# Altium PCB Control Board OLD.PcbDoc
Units mm, origin at the board's own origin, x right, y up, seen from the top; angles counter-clockwise.
Board outline 55 x 12 mm, 2 copper layers (Top Layer, Bottom Layer); 17 components, 12 nets, 54 pads, 30 vias.
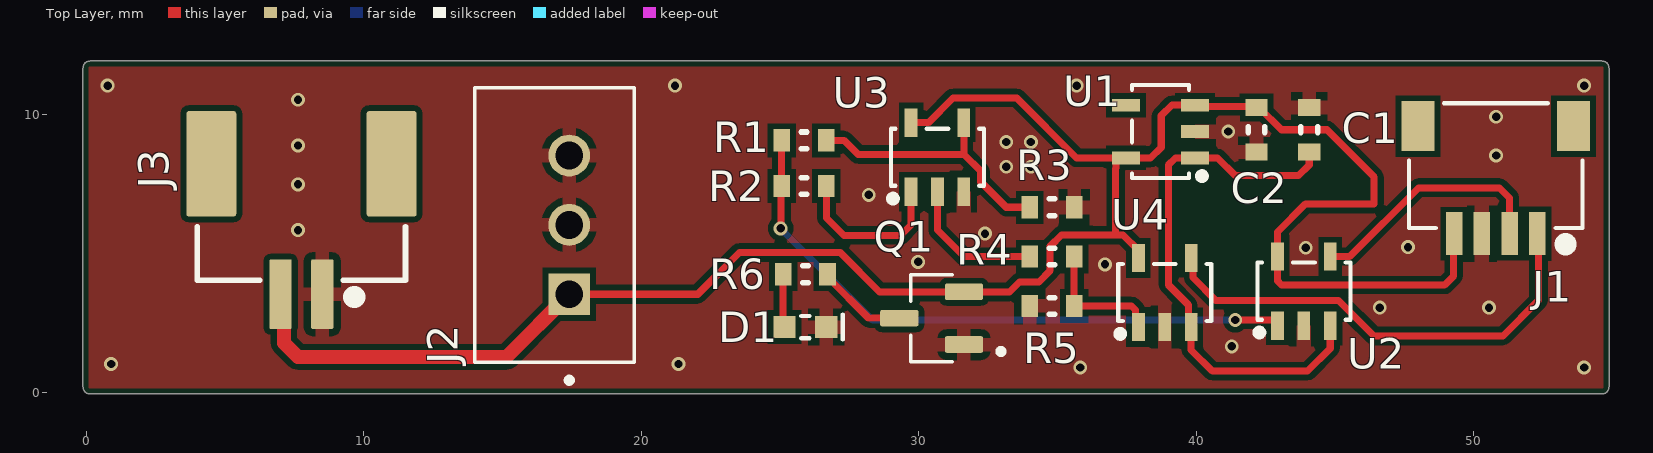
[diagram p0: Top Layer view]
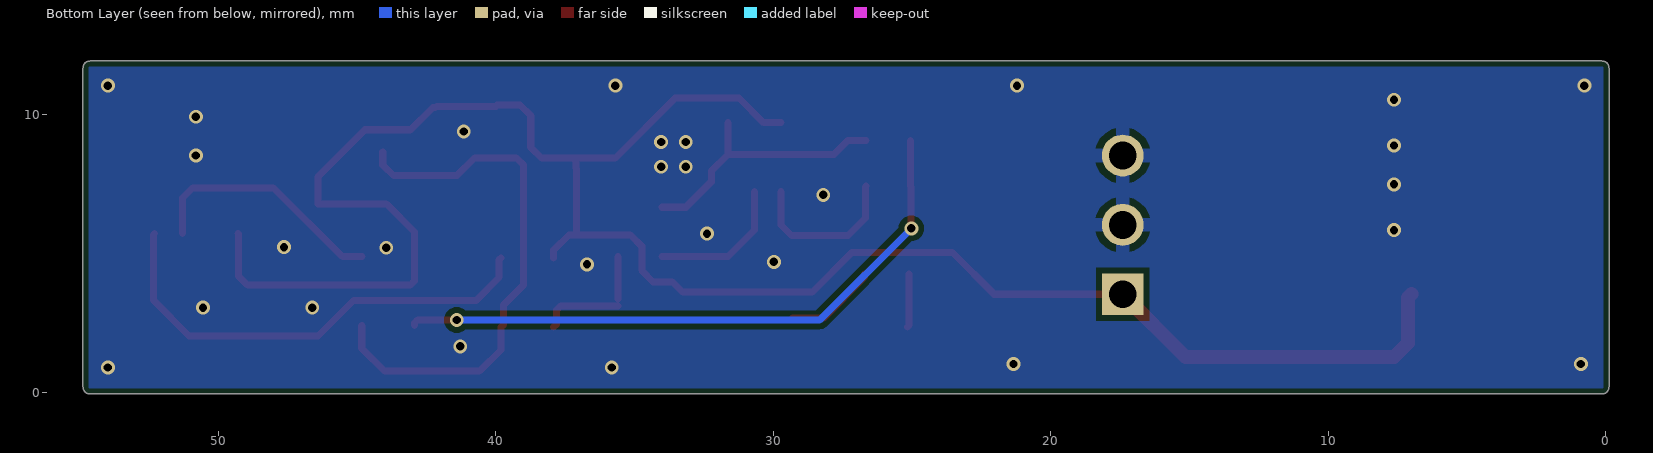
[diagram p1: Bottom Layer view, seen from below]
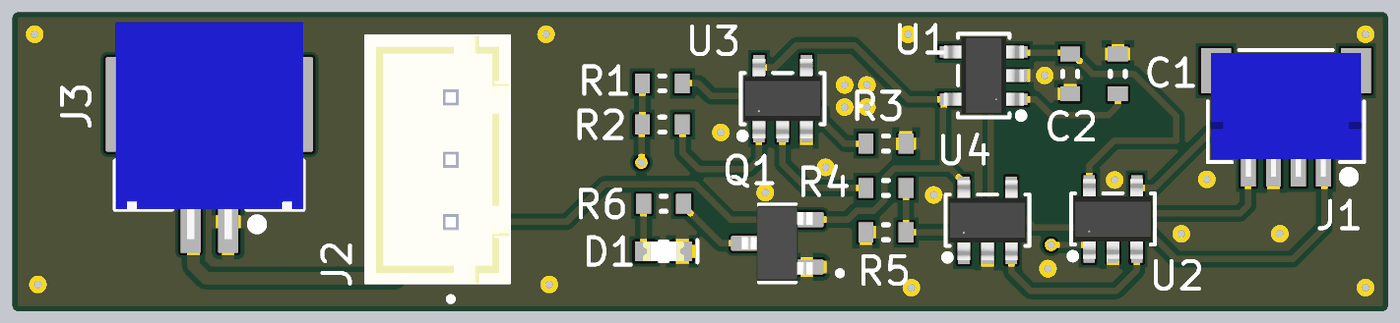
[diagram p2: 3D render of the assembled board from above, using the file's embedded part models]

## Layer stack, top to bottom
Top Solder: solder mask 0.0102, Solder Resist, Dk 3.5
Top Layer: signal copper 0.0356
Dielectric 1: dielectric 0.32, FR-4, Dk 4.8
Bottom Layer: signal copper 0.0356
Bottom Solder: solder mask 0.0102, Solder Resist, Dk 3.5

## Board outline
-0.127,0.192 -0.127,11.684 cw(c0.127,11.684) 0.127,11.938 54.619,11.938 cw(c54.619,11.684) 54.873,11.684 54.873,0.192 cw(c54.619,0.192) 54.619,-0.062 0.127,-0.062 cw(c0.127,0.192)

## Design rules (kind name [scope] priority, off if disabled: settings)
BoardOutlineClearance [All] p1: gap=0.2 ignorepadtopadclearanceinfootprint=FALSE except(0.4: Arc-SplitBarrior Arc-SplitContinuation Track-SplitBarrior Track-SplitContinuation SMDPad-SplitBarrior SMDPad-SplitContinuation THPad-SplitBarrior THPad-SplitContinuation Via-SplitBarrior Via-SplitContinuation Fill-SplitBarrior Fill-SplitContinuation Poly-SplitBarrior Poly-SplitContinuation Region-SplitBarrior Region-SplitContinuation Text-SplitBarrior Text-SplitContinuation)
Clearance "Clearance Bottom Layer" [OnLayer('Bottom Layer')] p1: gap=0.203 ignorepadtopadclearanceinfootprint=TRUE except(0.254: Arc-Text Track-Text SMDPad-Text THPad-Text Via-Text Fill-Text Poly-Text Region-Text Text-Text)
Clearance "Clearance Top Layer" [OnLayer('Top Layer')] p2: gap=0.203 ignorepadtopadclearanceinfootprint=TRUE except(0.254: Arc-Text Track-Text SMDPad-Text THPad-Text Via-Text Fill-Text Poly-Text Region-Text Text-Text)
Clearance [All] p3: gap=0.2 ignorepadtopadclearanceinfootprint=FALSE except(0.089: Arc-Arc Arc-Track Arc-SMDPad Track-Track Track-SMDPad SMDPad-SMDPad; 0.127: Arc-Via Track-Via SMDPad-Via THPad-Via Via-Via; 0.254: Arc-Text Track-Text SMDPad-Text THPad-Text Via-Text Fill-Text Poly-Text Region-Text Text-Text)
HoleSize [All] p1: absolutevalues=TRUE maxlimit=6.3 minlimit=0.2 maxpercent=80.000 minpercent=20.000
MinimumAnnularRing [All] p1: minimumring=0.076
MinimumSolderMaskSliver [All] p1: minsoldermaskwidth=0.1
PolygonConnect PolygonConnect_1 [All] p1: thpad.connectstyle=Relief thpad.reliefconductorwidth=0.508 thpad.reliefentries=4 thpad.polygonreliefangle="90 Angle" thpad.airgapwidth=0.254 smdpad.connectstyle=Relief smdpad.reliefconductorwidth=0.508 smdpad.reliefentries=4 smdpad.polygonreliefangle="90 Angle" smdpad.airgapwidth=0.254 via.connectstyle=Direct via.reliefconductorwidth=0.508 via.reliefentries=4 via.polygonreliefangle="90 Angle" via.airgapwidth=0.254
RoutingCorners [All] p1: cornerstyle=Round minsetback=2.54 maxsetback=2.54
RoutingVias [All] p1: holewidth=0.5 width=1 viastyle="Through Hole" minholewidth=0.2 minwidth=0.45 maxholewidth=1 maxwidth=2
SilkToSilkClearance [All] p1: silktosilkclearance=0.1
SilkToSolderMaskClearance [IsPad] p1: minsilkscreentomaskgap=0.1 clearancetoexposedcopper=TRUE
SolderMaskExpansion [All] p1: expansion=0.102 istentingtop=FALSE
Width [All] p1: maxlimit=2.54 minlimit=0.089 preferedwidth=0.381
25 further rules are at their usual default settings.

## Components (designator, comment, footprint, x,y, rotation, side; value= is the part's Value field where it differs from the comment)
C1 "0.10uF" 0603 44.069,9.46 r270 top
C2 "0.10uF" 0603 42.164,9.46 r270 top
D1 "0603 2V" "0603 - LED" 25.908,2.348 r0 top
J1 "SM04B-SRSS-TB(LF)(SN)" CONN_SM04B_JST 52.292,5.715 r180 top
J2 "B3B-XH-A(LF)(SN)" JST_B3B-XH-A(LF)(SN) 17.399,6.031 r90 top
J3 "SM02B-ZESS-TB(LF)(SN)" CONN_SM02B-ZESS-TB_JST 7.747,7.239 r180 top
Q1 "FET P_CH SOT23_3" SOT-23A-3 31.623,1.718 r180 top
R1 "JUMPER" 0603 25.856,9.079 r180 top value=0
R2 "JUMPER" 0603 25.856,7.428 r0 top value=0
R3 "JUMPER" 0603 34.798,6.666 r0 top value=0
R4 "JUMPER" 0603 34.798,4.888 r0 top value=0
R5 "JUMPER" 0603 34.798,3.11 r180 top value=0
R6 "1.1k" 0603 25.908,4.253 r180 top
U1 "REF2030QDDCRQ1" SOT-23-5_MC_MCH-L 39.954,8.444 r180 top
U2 "MCP6541RT-E/OT" SOT-23-5_MC_MCH-L 42.926,2.399 r90 top
U3 "SN74AHC1G08DBV3" SOT-23-5_MC_MCH-L 29.718,7.225 r90 top
U4 "MCP6541RT-E/OT" SOT-23-5_MC_MCH-L 37.912,2.348 r90 top

## Footprints (in the part's own frame and the unit in brackets; to place one, negate y for a bottom-side part, rotate by r counter-clockwise, add the part's x,y. Pads: shape width x height; smd on the part's side, far side on the other; paste and mask are expansions set on the pad)
0603 [mm] "Chip Resistor, 2-Leads, Body 1.60x0.80mm, IPC High Density"
  rect 0.6x0.8 smd mask+0.1: 1(-0.8,0) 2(0.8,0)
  silkscreen extent -0.1,-0.3 0.1,0.3, body extent -0.8,-0.4 0.8,0.4, height 0.6
"0603 - LED" [mm]
  rect 0.8x0.8 smd: 1(-0.75,0) 2(0.75,0)
  silkscreen extent -0.15,-0.45 1.35,0.45, body extent -0.8,-0.4 0.8,0.4, height 0.65
CONN_SM02B-ZESS-TB_JST [mm]
  rrect10% 1.8x3.8 smd: 0(-3.25,-0.994) 0(3.25,-0.994)
  rrect10% 0.8x2.5 smd: 1(-0.75,3.706) 2(0.75,3.706)
  silkscreen extent -3.75,1.27 3.76,3.81, body extent -3.75,-4.29 3.75,4.41, height 5.9
CONN_SM04B_JST [mm]
  rect 1.2x1.8 smd: 0(-1.3,-3.875) 0(4.3,-3.875)
  rect 0.6x1.55 smd: 1(0,0) 2(1,0) 3(2,0) 4(3,0)
  silkscreen extent -1.62,-4.7 4.62,0.38, body extent -1.5,-4.58 4.5,0.37, height 2.96
JST_B3B-XH-A(LF)(SN) [mm]
  rect 1.508x1.508 hole 1: 1(-2.5,0)
  round 1.508 hole 1: 2(0,0) 3(2.5,0)
  silkscreen extent -5.7,-2.35 4.95,3.4, body extent -4.96,-2.35 4.94,3.4, height 7
SOT-23-5_MC_MCH-L [mil]
  rect 40x18 smd: 1(0,0) 2(0,-37.4) 3(0,-74.8) 4(98,-74.8) 5(98,0)
  silkscreen extent -15,-103 90,31, body extent -14,-98 112,24, height 57
SOT-23A-3 [mm]
  rrect25% 1.38x0.6 smd: 1(0,0) 2(0,-1.9) 3(2.33,-0.95)
  silkscreen extent -1.44,-2.52 1.91,0.62, body extent -0.24,-2.45 2.59,0.55, height 1.2

## Part data
C1 C2: library part "CAP 0.10uF 16V", "CAP CER 0.10UF 16V X5R 0603", Operating Temperature="-55°C ~ 85°C", Package=0603/0805, Rating=16V, Temperature Coefficient=X5R, Tolerance=10%, Part Number="CAP 0.10uF 16V"
D1: library part "LED GREEN SMD 0603", "LED Uni-Color Green 574nm 2-Pin Chip LED T/R", Current Rating=20mA, Manufacturer Part Number 1=LTST-C190KGKT, Supplier Part Number 1=160-1435-1-ND, Voltage Rating - DC=2V, Part Number="LED GREEN SMD 0603", Pin Count=2, Supplier 1=Digi-Key, Supplier URL 1=https://www.digikey.ca/en/products/detail/lite-on-inc/LTST-C190KGKT/386815?s=N4IgTCBcDaIIwDYAMBaOAWAzAVjSgcgCIgC6AvkA
J1: library part "CN HDR 4POS JST SH_SR", "CONN HEADER SMD R/A 4POS 1MM", Mfr_Name=JST, Supplier Part Number 1=455-1804-1-ND, Copyright="Copyright (C) 2023 Ultra Librarian. All rights reserved.", Digi-Key_Part_Number_1=455-1804-2-ND, Digi-Key_Part_Number_2=455-1804-1-ND, Digi-Key_Part_Number_3=455-1804-6-ND, Manufacturer_Part_Number=SM04B-SRSS-TB(LF)(SN), Part Number="CN HDR 4POS JST SH_SR", Pin Count=4, RefDes=RefDes, Supplier 1=Digi-Key, Supplier URL 1=https://www.digikey.ca/en/products/detail/jst-sales-america-inc/SM04B-SRSS-TB-LF-SN/926710, Type=DEV
J2: library part "CN HDR 3POS JST XH", "Connector Header Through Hole 3 position 0.098 (2.50mm)", Package=None, Supplier Part Number 1=455-2248-ND, Availability="In Stock", Check_prices=https://www.snapeda.com/parts/B3B-XH-A(LF)(SN)/JST%20Sales%20America%20Inc./view-part/231271/?ref=eda, Manufacturer Part Number 1=B3B-XH-A(LF)(SN), MF="JST Sales", MP=B3B-XH-A(LF)(SN), Part Number="CN HDR 3POS JST XH", Price=None, SnapEDA_Link=https://www.snapeda.com/parts/B3B-XH-A(LF)(SN)/JST%20Sales%20America%20Inc./view-part/231271/?ref=snap, Supplier 1=Digi-Key, Supplier URL 1=https://www.digikey.com/en/products/detail/jst-sales-america-inc/B3B-XH-A-LF-SN/1651046
J3: library part "CN HDR 2POS JST ZE", "CONN HEADER SMD R/A 2POS 1.5MM", Manufacturer_Part_Number=SM02B-ZESS-TB, Mfr_Name=JST, Supplier Part Number 1=455-2395-1-ND, Copyright="Copyright (C) 2023 Ultra Librarian. All rights reserved.", Part Number="CN HDR 2POS JST ZE", Pin Count=2, RefDes=RefDes, Supplier 1=Digi-Key, Supplier URL 1=https://www.digikey.ca/en/products/detail/jst-sales-america-inc/SM02B-ZESS-TB-LF-SN/1887001, Type=DEV
Q1: library part "MOSFET P-CH CJ2305", "P-Channel MOSFET General Purpose P-CH SOT23-3", Part Number="MOSFET P-CH CJ2305"
R1 R2 R3 R4 R5: library part "RES 0 JUMPER", "RES SMD 0 OHM JUMPER GENERIC 0603", Manufacturer Part Number 1=RK73Z1JTTD, Package=0805, Supplier Part Number 1=2019-RK73Z1JTTDCT-ND, Tolerance=N/A, Part Number="RES 0 JUMPER", Supplier 1=Digi-Key, Supplier URL 1=https://www.digikey.ca/en/products/detail/koa-speer-electronics-inc/RK73Z1JTTD/9845478
R6: library part "RES 1.1k 1/8W", "Default Resistor Symbol", Package=0805, Power (Watts)=0.125W, Tolerance=5%, Part Number="RES 1.1k 1/8W"
U1: "Series Voltage Reference IC Fixed 1.5V, 3V V ±0.05% 20 mA SOT-23-THIN", Manufacturer_Part_Number=SN74AHC1G08DBV3, Mfr_Name="Texas Instruments", Supplier Part Number 1=296-REF2030QDDCRQ1CT-ND, Copyright="Copyright (C) 2023 Ultra Librarian. All rights reserved.", Digi-Key_Part_Number_1=2156-SN74AHC1G08DBV3-ND, Digi-Key_Part_Number_2=296-SN74AHC1G08DBV3CT-ND, Digi-Key_Part_Number_3=296-SN74AHC1G08DBV3DKR-ND, Digi-Key_Part_Number_4=296-SN74AHC1G08DBV3TR-ND, Manufacturer Part Number 1=REF2030QDDCRQ1, Part Number=REF2030QDDCRQ1, RefDes=RefDes, Supplier 1=Digi-Key, Supplier URL 1=https://www.digikey.ca/en/products/detail/texas-instruments/REF2030QDDCRQ1/15926651?s=N4IgjCBcpg7LBOKoDGUBmBDANgZwKYA0IA9lANogCsVAHHSALrEAOALlCAMpsBOAlgDsA5iAC%2BxALQAmZCDSQ%2BAVyKkK1JmK1A, Type=DEV
U2 U4: library part "COMPARATOR MCP6541RT-EOT", "IC COMP 1.6V SNGL P-P SOT23-5", Supplier Part Number 1=MCP6541RT-E/OTCT-ND, Manufacturer Part Number 1=MCP6541RT-E/OT, Part Number="COMPARATOR MCP6541RT-EOT", Supplier 1=Digi-Key, Supplier URL 1=https://www.digikey.ca/en/products/detail/microchip-technology/MCP6541RT-E-OT/870211
U3: "IC GATE AND 1CH 2-INP SOT23-5", Mfr_Name="Texas Instruments", Supplier Part Number 1=296-SN74AHC1G08DBV3CT-ND, Copyright="Copyright (C) 2023 Ultra Librarian. All rights reserved.", Digi-Key_Part_Number_1=2156-SN74AHC1G08DBV3-ND, Digi-Key_Part_Number_2=296-SN74AHC1G08DBV3CT-ND, Digi-Key_Part_Number_3=296-SN74AHC1G08DBV3DKR-ND, Digi-Key_Part_Number_4=296-SN74AHC1G08DBV3TR-ND, Manufacturer Part Number 1=SN74AHC1G08DBV3, Manufacturer_Part_Number=SN74AHC1G08DBV3, Part Number=SN74AHC1G08DBV3, RefDes=RefDes, Supplier 1=Digi-Key, Supplier URL 1=https://www.digikey.ca/en/products/detail/texas-instruments/SN74AHC1G08DBV3/10434480, Type=DEV

## Via types
v1: diameter 0.5, hole 0.3, Top Layer to Bottom Layer, 30 vias

## Nets (pads, with @x,y where several pads share a name; then routed paths per layer and width w, separated by ;. In a path a pad name is that pad's centre, name@x,y a point inside that pad or via, vN(x,y) a via of type N, cw(c..) or ccw(c..) an arc to the next point about the centre after c; other vN are vias at no path point)
+3.3: C2.1 J1.4 J2.1 J3.2 Q1.2 U1.3 U1.5 U2.5 U3.5 U4.5 | length 74.9
  Top Layer w0.254: J2.1 22.031,3.531 23.534,5.034 27.166,5.034 28.582,3.618 Q1.2 33.267,3.618 33.626,3.977 34.326,3.977 34.733,4.384 34.733,5.262 35.14,5.669 37.084,5.669 ; U3.5 30.342,9.714 31.231,10.603 33.528,10.603 35.687,8.444 U1.5@37.211,8.444 ; U4.5 37.912,5.117 37.359,5.669 37.084,5.669 ; J1.4 49.276,5.699 49.276,4.191 48.952,3.867 43.075,3.867 42.926,4.016 U2.5 42.926,5.777 43.926,6.777 46.41,6.777 46.41,7.753 44.704,9.46 43.064,9.46 42.264,10.26 C2.1 42.122,10.302 39.996,10.302 U1.3 39.949,10.349 39.116,10.349 38.735,9.968 38.735,8.825 38.354,8.444 U1.5 U1.5@37.211,8.444 ; 37.084,5.669 37.084,8.063 37.109,8.088 37.109,8.342 U1.5@37.211,8.444
  Top Layer w0.508: J3.2 7.112,3.418 7.112,1.778 7.62,1.27 15.138,1.27 J2.1
BKBM1: J1.2 U2.4 | length 8.9
  Top Layer w0.254: U2.4 45.528,4.888 48.006,7.366 50.927,7.366 51.292,7.001 J1.2
BKBM2: J1.1 U4.4 | length 17
  Top Layer w0.254: U4.4 39.873,4.776 39.873,4.131 40.699,3.304 45.124,3.304 46.396,2.032 51.056,2.032 52.324,3.3 52.324,5.683 J1.1
GND: C1.1 C2.2 D1.2 J1.3 J2.2 J2.3 J3.1 Q1.1 R3.2 R5.2 U1.2 U2.2 U3.3 U4.2
  other v1: 35.814,0.889 53.975,0.889 0.889,1.016 21.336,1.016 41.275,1.651 46.609,3.048 50.546,3.048 36.708,4.608 29.972,4.699 43.942,5.207 47.628,5.23 32.385,5.715 7.62,5.842 28.194,7.112 7.62,7.493 33.147,8.128 34.036,8.128 50.803,8.532 7.62,8.89 33.147,9.017 34.036,9.017 41.148,9.398 50.803,9.929 7.62,10.541 0.762,11.049 21.209,11.049 35.687,11.049 53.975,11.049
NetC1_2: C1.2 U1.1 U2.3 U4.3 | length 19.6
  Top Layer w0.254: C1.2 44.069,8.19 43.688,7.809 41.402,7.809 40.767,8.444 U1.1 39.243,8.444 38.989,8.19 38.989,3.872 39.71,3.151 39.71,2.45 U4.3 39.812,1.525 40.575,0.762 44.007,0.762 44.826,1.581 U2.3
NetD1_1: D1.1 R6.2 | length 1.9
  Top Layer w0.254: R6.2 25.108,2.398 D1.1
NetQ1_3: Q1.3 R6.1 | length 3.3
  Top Layer w0.254: R6.1 26.708,4.153 28.193,2.668 Q1.3
NetR1_1: R1.1 R3.1 U3.4 | length 9.7
  Top Layer w0.254: R1.1 27.305,9.079 27.813,8.571 31.618,8.571 U3.4 ; 31.623,8.571 32.227,7.966 32.227,7.585 33.147,6.666 R3.1
NetR1_2: R1.2 R2.1 U2.1 | length 22.6
  Top Layer w0.254: v1(25.019,5.904) 25.038,5.923 25.038,7.409 R2.1 R1.2 ; v1(41.402,2.602) 42.824,2.602 42.926,2.5 U2.1
  Bottom Layer w0.254: v1(25.019,5.904) 28.321,2.602 v1(41.402,2.602)
NetR2_2: R2.2 U3.1 | length 5.8
  Top Layer w0.254: R2.2 26.67,7.414 26.67,6.285 27.305,5.65 29.337,5.65 29.718,6.031 U3.1
NetR4_1: R4.1 U3.2 | length 5.1
  Top Layer w0.254: U3.2 30.668,5.843 31.623,4.888 R4.1
NetR4_2: R4.2 R5.1 U4.1 | length 4.5
  Top Layer w0.254: R5.1 37.661,3.11 37.81,2.961 37.81,2.45 U4.1 ; R5.1@35.598,3.364 R4.2
pads on no net: J1.0 J3.0 U1.4

## Polygon pours and split planes (outlines as drawn)
GND on Bottom Layer "GND_L02_P001" (solid, pour order 1): -4.191,14.859 57.277,14.859 57.277,-3.556 -2.032,-3.556
GND on Top Layer "GND_L01_P000" (solid, remove dead copper, pour order 0): -1.874,13.865 -1.874,13.992 56.165,13.992 56.165,-3.153 -2.509,-3.153 -2.509,4.594

## Silkscreen, mask and mechanical layers (free items; w line width, h text height)
Mechanical 1:
  the board outline again, w0.254